# Altium PCB wilkinson_splitter(500Mhz to 1000Mhz)_OG.PcbDoc
Units mil, origin at the board's own origin, x right, y up, seen from the top; angles counter-clockwise.
Board outline 2930 x 1999.66 mil, 2 copper layers (Top Layer, Bottom Layer); 4 components, 2 nets, 17 pads, 6 vias.
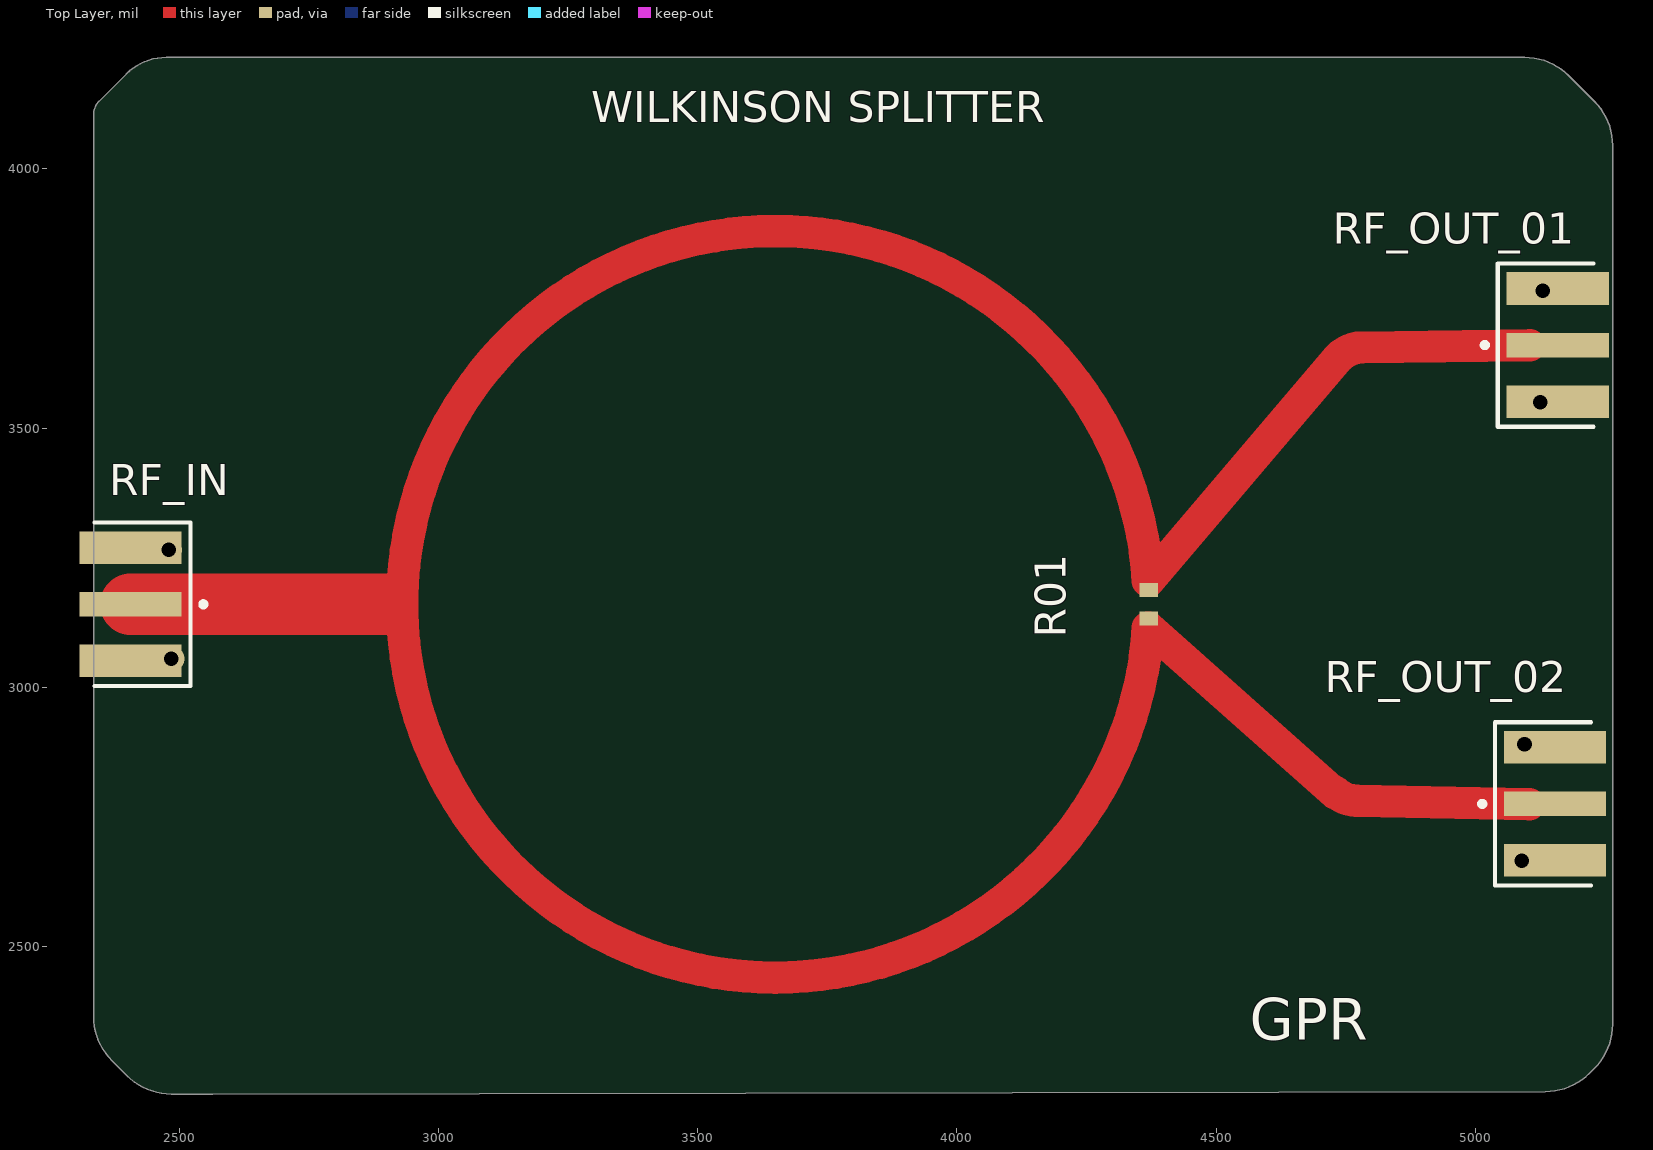
[diagram p0: Top Layer view]
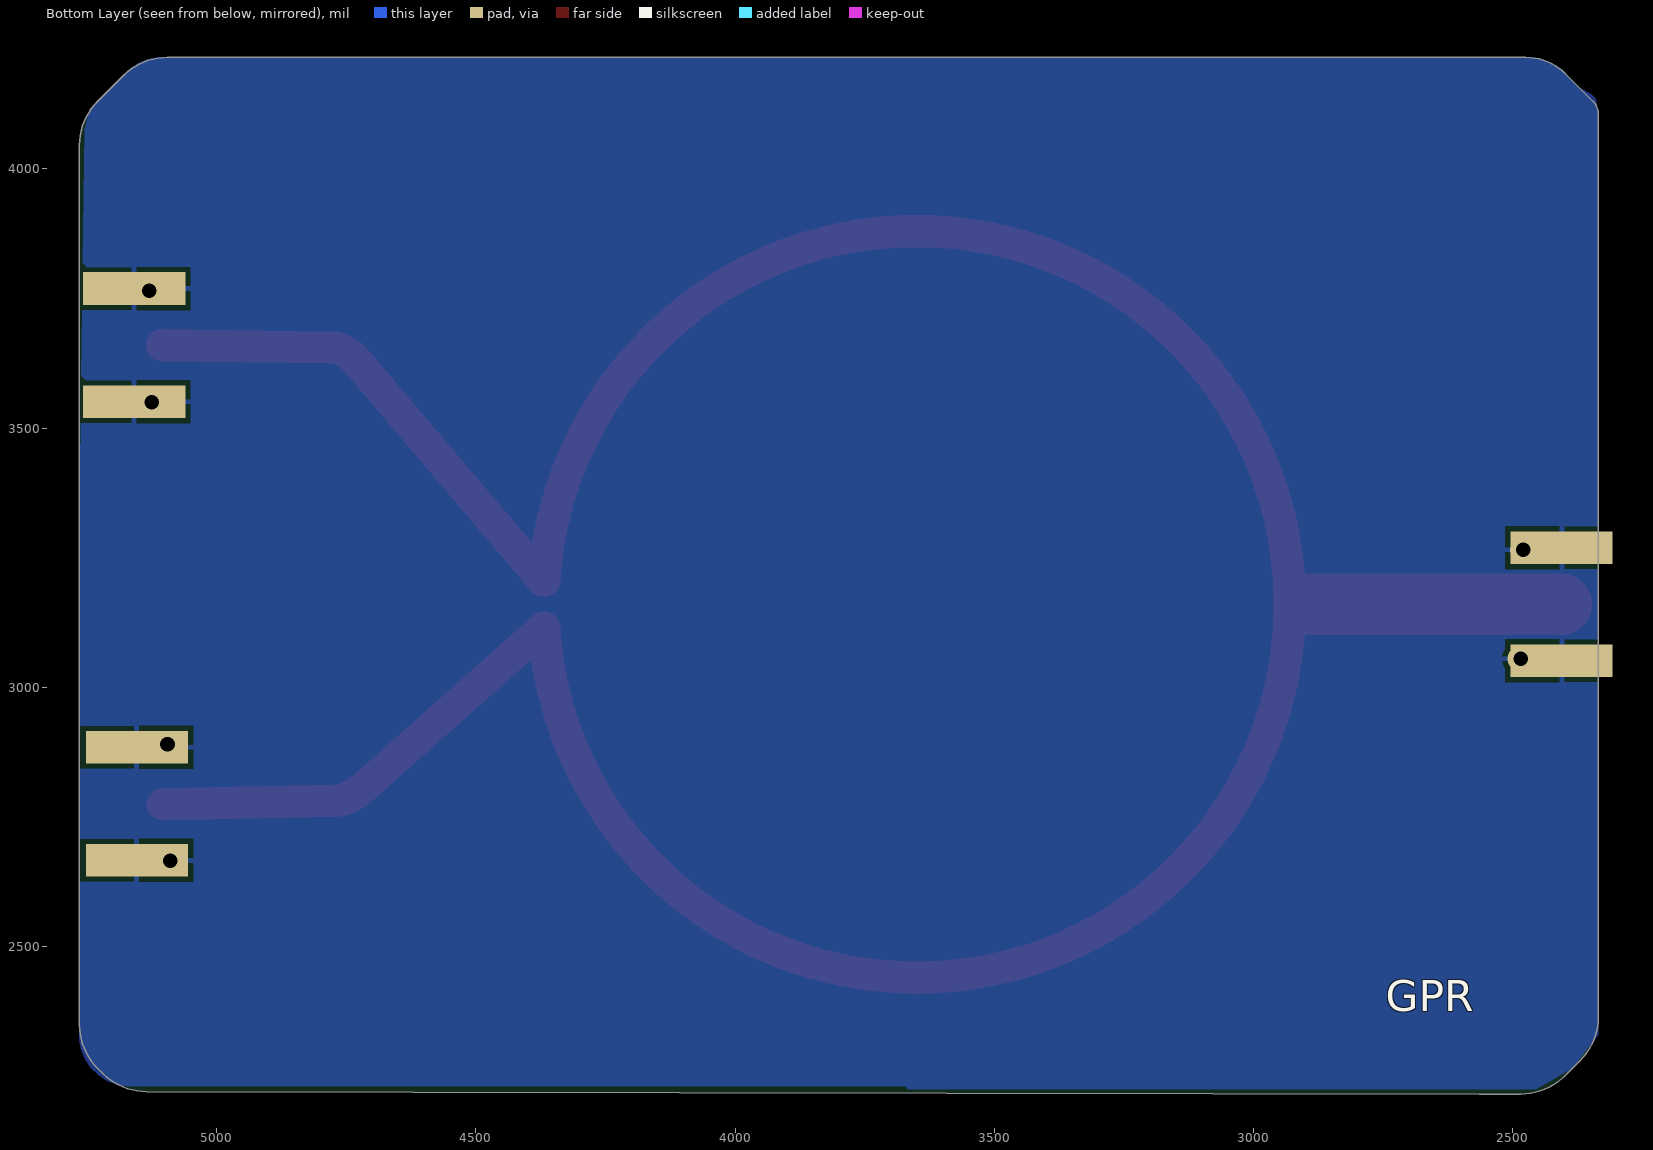
[diagram p1: Bottom Layer view, seen from below]

## Layer stack, top to bottom
Top Solder: solder mask 0.4, Solder Resist, Dk 3.5
Top Layer: signal copper 1.4
Dielectric 1: dielectric 12.6, FR-4, Dk 4.4
Bottom Layer: signal copper 1.4
Bottom Solder: solder mask 0.4, Solder Resist, Dk 3.5

## Board outline
2370.36,2279.64 cw(c2455.71,2365) 2335,2365 2335,4105.86 cw(c2369.14,4105.86) 2345,4130 2398.18,4183.18 cw(c2475,4106.36) 2475,4215 5095,4215 cw(c5095,4094.29) 5180.36,4179.64 5229.64,4130.36 cw(c5144.29,4045) 5265,4045 5265,2350 cw(c5144.29,2350) 5229.64,2264.64 5220.36,2255.36 cw(c5135,2340.71) 5135,2220 2565.02,2215.34 2484.66,2215.34 cw(c2484.66,2336.05) 2399.31,2250.69

## Design rules (kind name [scope] priority, off if disabled: settings)
Clearance [All] p1: gap=10 ignorepadtopadclearanceinfootprint=FALSE
PolygonConnect [All] p1: connectstyle=Relief reliefconductorwidth=10 reliefentries=4 polygonreliefangle="90 Angle" airgapwidth=10
RoutingVias [All] p1: holewidth=28 width=50 viastyle="Through Hole" minholewidth=28 minwidth=50 maxholewidth=28 maxwidth=50
SolderMaskExpansion [All] p1: expansion=4 istentingtop=FALSE
SupplyNets "Schematic Supply Nets" [InNet('GND')] p1: voltage=0.000
Width [All] p1: maxlimit=118.11 minlimit=11.22 preferedwidth=11.22 bottomlayer_maxwidth=11.22 minimp=50.000000 maximp=50.000000 favimp=50.000000
30 further rules are at their usual default settings.

## Components (designator, comment, footprint, x,y, rotation, side; value= is the part's Value field where it differs from the comment)
R01 "RC0603JR-10100RL" RESC1608X55X25NL10T15 4370,3160 r90 top
RF_IN "CON-SMA-EDGE-S" FP-CON-SMA-EDGE-S-MFG 2120,3160 r90 top
RF_OUT_01 "CON-SMA-EDGE-S" FP-CON-SMA-EDGE-S-MFG 5445,3660 r270 top
RF_OUT_02 "CON-SMA-EDGE-S" FP-CON-SMA-EDGE-S-MFG 5440,2775 r270 top

## Footprints (in the part's own frame and the unit in brackets; to place one, negate y for a bottom-side part, rotate by r counter-clockwise, add the part's x,y. Pads: shape width x height; smd on the part's side, far side on the other; paste and mask are expansions set on the pad)
FP-CON-SMA-EDGE-S-MFG [mm]
  rect 1.2x5 smd paste+0 mask+0: 1(0,-7.26)
  rect 1.6x5 smd paste+0 mask+0: 2(-2.77,-7.26) 3(2.77,-7.26)
  rect 1.6x5 smd far side paste+0 mask+0: 4(-2.77,-7.26) 5(2.77,-7.26)
  silkscreen extent -4,-10.96 4,-5.5, body extent -3.67,-9.86 3.67,4.86, height 0.25
RESC1608X55X25NL10T15 [mm] "Chip Resistor, 2-Leads, Body 1.60x0.80mm, IPC Medium Density"
  rect 0.7x0.9 smd: 1(-0.7,0) 2(0.7,0)
  body extent -2.54,-2.54 2.54,2.54, height 0.55

## Part data
R01: library part CMP-2000-04302-1, Manufacturer=Yageo, Part Number=RC0603JR-10100RL
RF_IN RF_OUT_01 RF_OUT_02: library part CMP-204357-000001-1, "CONN SMA JACK STR EDGE MNT", Frequency=18GHz, Manufacturer="RF Solutions Ltd.", Package=CONN_JACK, Automotive=No, Category=Conn, ComponentLink2Description=Datasheet, ComponentLink2URL=https://www.rfsolutions.co.uk/downloads/1498648656DS-CON-EDGE-SMA-4.pdf, Conn Orientation="Right Angle", Contact Material=Gold, Device Class L1=Connectors, Device Class L2="RF / Coaxial Connectors", Device Class L3=unset, Digikey Description="CONN SMA JACK STR EDGE MNT", Footprint Url=https://forum.upverter.com/uploads/default/original/3X/b/e/be75b907af57498775929d6d9099689c472e0307.pdf, Height=6.35mm, Impedance=50Ω, Is Female=yes, Lead Free=Yes, Manufacturer Part Number=CON-SMA-EDGE-S, Number Of Contacts=1, Octopart=https://octopart.com/con-sma-edge-s-rf+solutions-70967450, RoHS=TRUE, Shielding=true

## Via types
v1: diameter 50, hole 28, Top Layer to Bottom Layer, 6 vias

## Nets (pads, with @x,y where several pads share a name; then routed paths per layer and width w, separated by ;. In a path a pad name is that pad's centre, name@x,y a point inside that pad or via, vN(x,y) a via of type N, cw(c..) or ccw(c..) an arc to the next point about the centre after c; other vN are vias at no path point)
GND: RF_IN.2 RF_IN.3 RF_IN.4 RF_IN.5 RF_OUT_01.2 RF_OUT_01.3 RF_OUT_01.4 RF_OUT_01.5 RF_OUT_02.2 RF_OUT_02.3 RF_OUT_02.4 RF_OUT_02.5 | length 192.7
  Bottom Layer w11.22: RF_IN.4 2478.24,3030.75 RF_IN.4@2498.64,3025.06 ; RF_OUT_02.4@5061.36,2909.94 5097.73,2899.8 RF_OUT_02.4
  other v1: 5090,2665 5095,2890 2485,3055 2480,3265 5125,3550 5130,3765
NetR01_1: R01.1 R01.2 RF_IN.1 RF_OUT_01.1 RF_OUT_02.1 | length 6726.8
  Top Layer w62.6: 4368.59,3114.95 cw(c3650,3160) 4368.59,3205.05 ; 4370,3115 4730,2795 ; 4370,3205 4735,3635 ; 4728.8,2798.79 ccw(c4772.39,2843.72) 4770.85,2781.14 ccw(c4772.42,2843.72) 4771.07,2781.13 4771.19,2781.13 RF_OUT_02.1@5104.22,2774.73 ; 4736.98,3636.75 cw(c4781.54,3592.77) 4780.64,3655.37 RF_OUT_01.1@5105,3660
  Top Layer w118.11: RF_IN.1 2900,3160

## Polygon pours and split planes (outlines as drawn)
GND on Bottom Layer "GND_L02_P000" (solid, pour order 0): 2371.59,4156.59 2400.71,4185.71 cw(c2471.42,4115) 2471.42,4215 5103.58,4215 cw(c5103.58,4115) 5174.29,4185.71 5245,4115 5255,4075 5265,3270 5265,2330 cw(c5165,2330) 5165,2230 3670,2230 cw(c3665,2230) 3665,2225 2455,2225 2384.83,2265.17 2335,2330 2335,4105.86 2340,4135 2350,4145

## Silkscreen, mask and mechanical layers (free items; w line width, h text height)
Top Overlay:
  text "WILKINSON SPLITTER" at 3295,4090 h60
  text "GPR" at 4565,2320 h80
Bottom Overlay:
  text "GPR" at 2745,2375 h60
Mechanical 1:
  lines w10: 2335,2365 ccw(c2455.71,2365) 2370.36,2279.64 2399.31,2250.69 ccw(c2484.66,2336.05) 2484.66,2215.34 2565.02,2215.34 5135,2220 ccw(c5135,2340.71) 5220.36,2255.36 5229.64,2264.64 ccw(c5144.29,2350) 5265,2350 5265,4045 ccw(c5144.29,4045) 5229.64,4130.36 5180.36,4179.64 ccw(c5095,4094.29) 5095,4215 2475,4215 ccw(c2475,4106.36) 2398.18,4183.18 2345,4130 ccw(c2369.14,4105.86) 2335,4105.86 2335,4055 2335,2365